# Altium PCB rear.PcbDoc
Units mm, origin at the board's own origin, x right, y up, seen from the top; angles counter-clockwise.
Board outline 134.65 x 5.5 mm, 2 copper layers (Top Layer, Bottom Layer); 26 components, 32 nets, 50 pads, 2 vias.
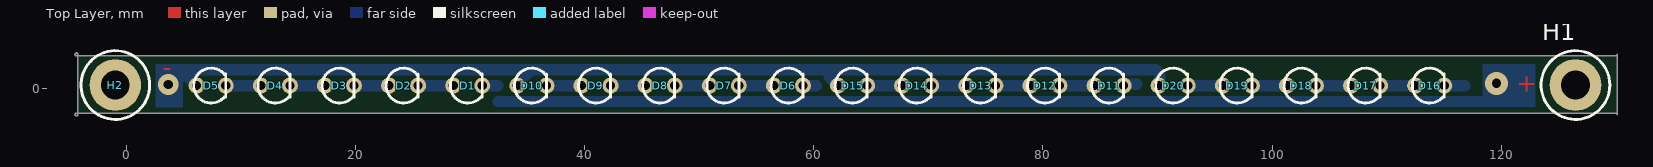
[diagram p0: Top Layer view]
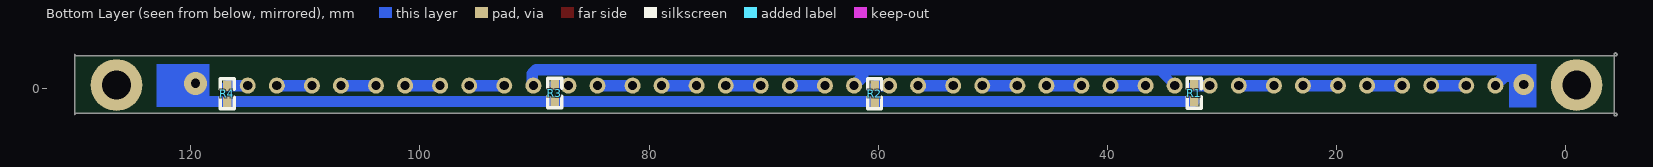
[diagram p1: Bottom Layer view, seen from below]

## Layer stack, top to bottom
Top Layer: signal copper 0.0356
Dielectric: dielectric 0.32, FR-4, Dk 4.8
Bottom Layer: signal copper 0.0356

## Board outline
-4.4,-2.377 cw(c-4.4,-2.25) -4.527,-2.25 cw(c-4.4,-2.25) -4.4,-2.123 130,-2.123 cw(c130,-2.25) 130.127,-2.25 130.127,3 cw(c130,3) 130,2.873 -4.4,2.873 cw(c-4.4,3) -4.527,3 cw(c-4.4,3) -4.4,3.127 cw(c-4.4,3) -4.273,3 -4.273,-2.25 cw(c-4.4,-2.25)

## Design rules (kind name [scope] priority, off if disabled: settings)
Clearance [All] p1: gap=0.2
FabricationTestPointUsage TestPointUsage [All] p1: valid=0 allowmultiple=FALSE
FabricationTestpoint Testpoint [All] p1: side=3 testpointundercomponent=TRUE minsize=1.016 maxsize=2.54 preferedsize=1.524 minholesize=0 maxholesize=1.016 preferedholesize=0.813 testpointgrid=0.025 allowsidetop=TRUE allowsidebottom=TRUE usegrid=TRUE gridtolerance=0
HoleSize [All] p1: absolutevalues=TRUE maxlimit=2.54 minlimit=0.4 maxpercent=80.000 minpercent=20.000
PolygonConnect [All] p1: connectstyle=Relief reliefconductorwidth=0.254 reliefentries=4 polygonreliefangle="90 Angle"
RoutingVias [All] p1: holewidth=0.711 width=1.27 viastyle="Through Hole" minholewidth=0.4 minwidth=0.7 maxholewidth=1 maxwidth=2
SilkscreenOverComponentPads [All] p1: minsilkscreentomaskgap=0.254
SolderMaskExpansion [All] p1: expansion=0.102
Width [All] p1: maxlimit=1 minlimit=0.2 preferedwidth=0.95 toplayer_prefwidth=0.25 minimp=50.000000 maximp=50.000000 favimp=50.000000
24 further rules are at their usual default settings.

## Components (designator, comment, footprint, x,y, rotation, side; value= is the part's Value field where it differs from the comment)
D1 "LED" LED0.1 28.5,0.275 r0 top
D2 "LED" LED0.1 22.9,0.275 r0 top
D3 "LED" LED0.1 17.3,0.275 r0 top
D4 "LED" LED0.1 11.7,0.275 r0 top
D5 "LED" LED0.1 6.1,0.275 r0 top
D6 "LED" LED0.1 56.5,0.275 r0 top
D7 "LED" LED0.1 50.9,0.275 r0 top
D8 "LED" LED0.1 45.3,0.275 r0 top
D9 "LED" LED0.1 39.7,0.275 r0 top
D10 "LED" LED0.1 34.1,0.275 r0 top
D11 "LED" LED0.1 84.5,0.275 r0 top
D12 "LED" LED0.1 78.9,0.275 r0 top
D13 "LED" LED0.1 73.3,0.275 r0 top
D14 "LED" LED0.1 67.7,0.275 r0 top
D15 "LED" LED0.1 62.1,0.275 r0 top
D16 "LED" LED0.1 112.5,0.275 r0 top
D17 "LED" LED0.1 106.9,0.275 r0 top
D18 "LED" LED0.1 101.3,0.275 r0 top
D19 "LED" LED0.1 95.7,0.275 r0 top
D20 "LED" LED0.1 90.1,0.275 r0 top
H1 "HOLE" M2.5 126.5,0.325 r0 top
H2 "HOLE" M2.5 -1,0.325 r0 top
R1 "56" 0603 32.4,0.3 r270 bottom
R2 "56" 0603 60.3,0.275 r270 bottom
R3 "56" 0603 88.225,0.325 r270 bottom
R4 "56" 0603 116.825,0.275 r270 bottom

## Footprints (in the part's own frame and the unit in brackets; to place one, negate y for a bottom-side part, rotate by r counter-clockwise, add the part's x,y. Pads: shape width x height; smd on the part's side, far side on the other; paste and mask are expansions set on the pad)
0603 [mil]
  rect 35.43x30 smd: 1(0,0) 2(55,0)
  silkscreen extent -24,-24 79,24
LED0.1 [mil]
  round 55 hole 31.5: A(0,0) K(100,0)
  silkscreen extent -10,-60 100,60
M2.5 [mm]
  round 4.5 hole 2.5: 1(0,0)
  silkscreen extent -3,-3 3,3

## Part data
H1 H2: "Hole"
R1 R2 R3 R4: library part RES1, "Resistor"

## Via types
v1: diameter 2, hole 0.8, Top Layer to Bottom Layer, 1 vias
v2: diameter 1.8, hole 0.8, Top Layer to Bottom Layer, 1 vias

## Nets (pads, with @x,y where several pads share a name; then routed paths per layer and width w, separated by ;. In a path a pad name is that pad's centre, name@x,y a point inside that pad or via, vN(x,y) a via of type N, cw(c..) or ccw(c..) an arc to the next point about the centre after c; other vN are vias at no path point)
GND: D5.A D10.A D15.A D20.A | length 93.6
  Bottom Layer w0.8: D10.A 35.375,1.55
  Bottom Layer w1: 3.525,1.375 3.825,1.675 ; 3.75,1.675 3.825,1.675 ; 4.275,1.1 5.275,1.1 D5.A ; 7.85,1.675 3.825,1.675 ; 8,1.675 61.33,1.675 ; D15.A 61.33,1.045 61.33,1.675 ; D20.A@90.19,0.328 90.205,1.331 89.87,1.675 61.33,1.675
  other v2: 3.625,0.375
NetD1_A: D1.A D2.K | length 3.1
  Bottom Layer w1: D2.K D1.A
NetD1_K: D1.K R1.1 | length 1.4
  Bottom Layer w1: D1.K R1.1@32.4,0.275
NetD2_A: D2.A D3.K | length 3
  Bottom Layer w1: D3.K@19.94,0.275 D2.A
NetD3_A: D3.A D4.K | length 3.1
  Bottom Layer w1: D4.K@14.24,0.25 D3.A@17.3,0.25
NetD4_A: D4.A D5.K | length 3
  Bottom Layer w1: D5.K D4.A@11.66,0.275
NetD6_A: D6.A D7.K | length 3.1
  Bottom Layer w1: D7.K D6.A
NetD6_K: D6.K R2.1 | length 1.2
  Bottom Layer w1: D6.K R2.1@60.2,0.275
NetD7_A: D7.A D8.K | length 3.1
  Bottom Layer w1: D8.K D7.A
NetD8_A: D8.A D9.K | length 3.1
  Bottom Layer w1: D9.K D8.A@45.36,0.275
NetD9_A: D9.A D10.K | length 3.1
  Bottom Layer w1: D10.K D9.A
NetD11_A: D11.A D12.K | length 3.1
  Bottom Layer w1: D12.K D11.A
NetD11_K: D11.K R3.1 | length 1
  Bottom Layer w1: D11.K@87.21,0.375 R3.1@88.2,0.375
NetD12_A: D12.A D13.K | length 3.1
  Bottom Layer w1: D13.K D12.A
NetD13_A: D13.A D14.K | length 3.1
  Bottom Layer w1: D14.K D13.A
NetD14_A: D14.A D15.K | length 3.1
  Bottom Layer w1: D15.K D14.A
NetD16_A: D16.A D17.K | length 3.2
  Bottom Layer w1: D17.K D16.A@112.6,0.275
NetD16_K: D16.K R4.1 | length 1.8
  Bottom Layer w1: D16.K R4.1
NetD17_A: D17.A D18.K | length 3.1
  Bottom Layer w1: D18.K@103.77,0.275 D17.A
NetD18_A: D18.A D19.K | length 3
  Bottom Layer w1: D19.K D18.A@101.23,0.275
NetD19_A: D19.A D20.K | length 3.1
  Bottom Layer w1: D20.K D19.A
NetD21_A: 
NetD21_K: 
NetD22_A: 
NetD23_A: 
NetD24_A: 
NetD26_A: 
NetD26_K: 
NetD27_A: 
NetD28_A: 
NetD29_A: 
VCC: R1.2 R2.2 R3.2 R4.2 | length 86.4
  Bottom Layer w0.95: R1.2@32.4,-1.125 118.8,-1.125
  other v1: 119.6,0.475
pads on no net: H1.1 H2.1

## Other copper
Top Layer:
  text "-" at 3.15,1.15 h1.52
  text "+" at 121.375,-0.275 h1.52
Bottom Layer:
  rectangle net VCC: 118.4,-1.6 123,2.175
  rectangle net GND: 2.5,-1.625 4.9,2.175

## Silkscreen, mask and mechanical layers (free items; w line width, h text height)
Mechanical 1:
  lines w0.254: -4.4,-1.975 -4.4,2.825 130,2.825 ; -4.4,2.525 -4.4,-2.225 ; -4.25,6.271 -4.25,6.779 ; -2.727,6.014 -4.25,6.525 ; -2.725,7.03 -4.25,6.525 ; 54.978,6.426 -4.25,6.525 ; 70.772,6.399 130,6.3 ; 128.475,5.795 130,6.3 ; 128.477,6.811 130,6.3 ; 130,6.046 130,6.554 ; -4.4,-2.225 130,-2.225 ; -4.4,-2.225 130,-2.225 ; 130,-2.225 130,2.825 ; 130,-2.225 130,2.825
  text "134.25 (mm)" at 55.231,5.511 h1.52 r359.9